# Altium PCB RPi_TSOP.PcbDoc
Units mil, origin at the board's own origin, x right, y up, seen from the top; angles counter-clockwise.
Board outline 500 x 600 mil, 2 copper layers (Top Layer, Bottom Layer); 4 components, 7 nets, 18 pads, 0 vias.
Unrouted connection lines stored in the file: 6.
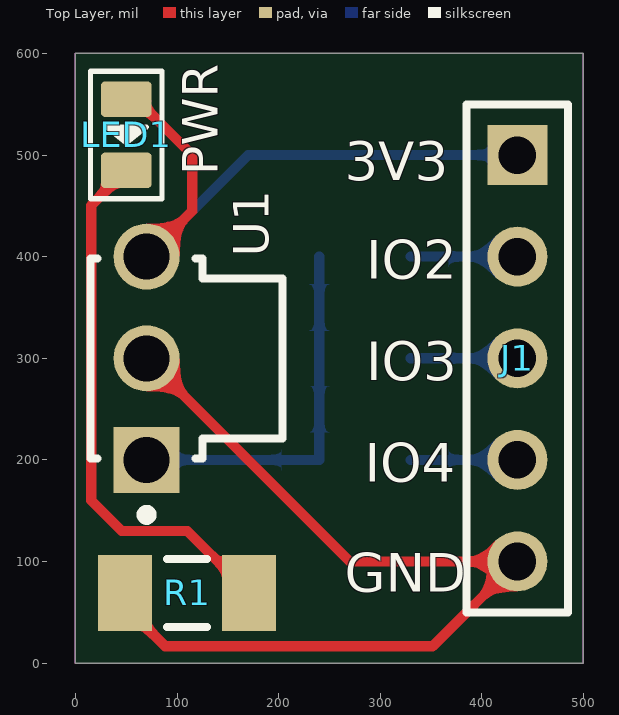
[diagram p0: Top Layer view]
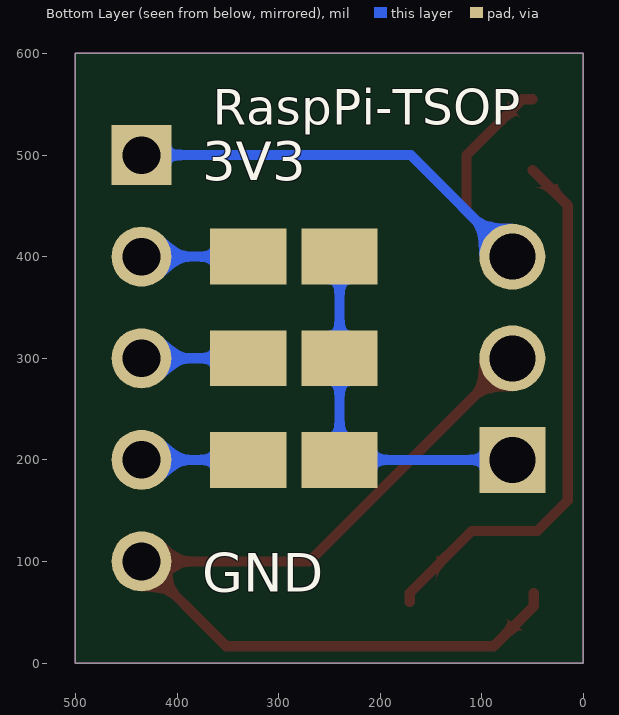
[diagram p1: Bottom Layer view, seen from below]

## Layer stack, top to bottom
Top Solder: solder mask 0.4, Solder Resist, Dk 3.5
Top Layer: signal copper 1.4
Dielectric 1: dielectric 12.6, FR-4, Dk 4.8
Bottom Layer: signal copper 1.4
Bottom Solder: solder mask 0.4, Solder Resist, Dk 3.5

## Board outline
0,0 500,0 500,600 0,600

## Design rules (kind name [scope] priority, off if disabled: settings)
Clearance [All] p1: gap=6 ignorepadtopadclearanceinfootprint=FALSE
ComponentClearance [All] p1 off: gap=10 collisioncheckmode=3 verticalgap=10 showdistances=FALSE
Height [All] p1 off: minheight=0 maxheight=1000 prefheight=500
MinimumSolderMaskSliver [All] p1: minsoldermaskwidth=5
PolygonConnect [All] p1: connectstyle=Relief reliefconductorwidth=10 reliefentries=4 polygonreliefangle="90 Angle" airgapwidth=10
RoutingVias [All] p1: holewidth=28 width=50 viastyle="Through Hole" minholewidth=28 minwidth=50 maxholewidth=28 maxwidth=50
SilkToSolderMaskClearance [IsPad] p1: minsilkscreentomaskgap=7 clearancetoexposedcopper=TRUE
SolderMaskExpansion [All] p1: expansion=4
Width [All] p1: maxlimit=100 minlimit=10 preferedwidth=10
26 further rules are at their usual default settings.

## Components (designator, comment, footprint, x,y, rotation, side; value= is the part's Value field where it differs from the comment)
J1 "RaspberryPI Conn" HDR1X5 435,500 r270 top
LED1 "PWR" LED-0805 50,520 r270 top value=LED-0805
R1 "Resistor" RESC1206(3216)_M 110,68.98 r180 top value=1k
U1 "TSOP38238" VISH-TSOP38238 70,300 r90 top

## Footprints (in the part's own frame and the unit in brackets; to place one, negate y for a bottom-side part, rotate by r counter-clockwise, add the part's x,y. Pads: shape width x height; smd on the part's side, far side on the other; paste and mask are expansions set on the pad)
HDR1X5 [mm] "Connector; Header; 5 Position"
  rect 1.5x1.5 hole 0.94: 1(0,0)
  round 1.5 hole 0.94: 2(2.54,0) 3(5.08,0) 4(7.62,0) 5(10.16,0)
  silkscreen extent -1.27,-1.27 11.43,1.27
LED-0805 [mil]
  rrect25% 35x50 smd: +(-35,0) -(35,0)
  silkscreen extent -63,-35 63,35
RESC1206(3216)_M [mm]
  rect 1.35x1.9 smd: 1(-1.55,0) 2(1.55,0)
  silkscreen extent -0.5,-0.85 0.5,0.85, body extent -1.67,-0.87 1.67,0.87, height 0.75
VISH-TSOP38238 [mm] "TH, 3-Leads, Body 5.00x4.80mm, Pitch 2.54mm"
  rect 1.65x1.65 hole 1.15: 1(-2.54,0)
  round 1.65 hole 1.15: 2(0,0) 3(2.54,0)
  silkscreen extent -4.04,-3.4 2.5,1.4, body extent -2.89,-3.4 2.89,1.4, height 8.55

## Part data
J1: library part "Header 5", "Header, 5-Pin", LatestRevisionDate=17-Jul-2002, LatestRevisionNote="Re-released for DXP Platform.", Publisher="Altium Limited"
LED1: library part SMD-LED-CLEAR-RED(0805), "5V Power Indicator", MPN=17-215SURC/S530-A2/TR8, PackageDescription=0805, PackageReference=0805
R1: library part CMP-2003-01077-1, "RESISTOR, SMD, 1206", Tolerance=5%, PackageDescription=1206, PackageReference=1206
U1: library part CMP-1666-00022-1, "IR Receiver Modules for Remote Control System, 2.5 to 5.5 V, -25 to 85 degC, 3-Pin THD, RoHS, Bulk", Capacitance="1.8E-11 f", Frequency="24 MHz", Frequency Tolerance=30ppm, Load Capacitance="18 pF", Max Operating Temperature=70degC, Min Operating Temperature=-20degC, Package Quantity=1000, Resistance="40 Ohm", ComponentLink1Description="Manufacturer URL", ComponentLink1URL=http://www.vishay.com/, ComponentLink2Description=Datasheet, ComponentLink2URL=http://www.vishay.com/docs/82491/tsop382.pdf, DatasheetVersion="Rev. 1.5, 07/2016", ESR="40 Ohm", Height="0.041 inch", Length="0.197 inch", Mount="Surface Mount", PackageDescription="3-Pin Through Hole Device, Body 5.00 x 4.80 mm, Pitch 2.54 mm", PackageReference=VISH-TSOP38238, Packaging="Tape and Reel", Pins=4, REACH SVHC="No SVHC", RoHSCompliant=True, Tolerance=30ppm, Width="0.126 inch"

## Free pads (board coordinates)
  rect 75x55 smd far side: 2(330,400) 3(330,300) 4(330,200) 5(240,200) 5(240,300) 5(240,400)

## Nets (pads, with @x,y where several pads share a name; then routed paths per layer and width w, separated by ;. In a path a pad name is that pad's centre, name@x,y a point inside that pad or via, vN(x,y) a via of type N, cw(c..) or ccw(c..) an arc to the next point about the centre after c; other vN are vias at no path point)
3V3: J1.1 LED1.+ U1.3 | length 612.8
  Top Layer w10: LED1.+ 60,555 115,500 115,445 U1.3
  Bottom Layer w10: U1.3 170,500 J1.1
GND: J1.5 R1.2 U1.2 | length 897.7
  Top Layer w10: R1.2 48.98,56.02 88.43,16.57 351.57,16.57 J1.5 270,100 U1.2
GPIO2: J1.2 pad.2 | length 105
  Bottom Layer w10: pad.2 J1.2
GPIO3: J1.3 pad.3 | length 105
  Bottom Layer w10: pad.3 J1.3
GPIO4: J1.4 pad.4 | length 105
  Bottom Layer w10: pad.4 J1.4
Net_U1: pad.5 U1.1 | length 370
  Bottom Layer w10: U1.1 240,200 240,300 pad.5@240,400
NetLED1_-: LED1.- R1.1 | length 541.5
  Top Layer w10: LED1.- 15.5,450.5 15.5,160 45.5,130 110,130 R1.1 R1.1@171.02,60

## Keep-outs
Keep-Out Layer:
  the board outline again, w1

## Silkscreen, mask and mechanical layers (free items; w line width, h text height)
Top Overlay:
  text "3V3" at 265,475 h38
  text "IO2" at 286.16,378.43 h38
  text "IO3" at 286.16,278.43 h38
  text "IO4" at 284.49,178.43 h38
  text "GND" at 265,70 h38
Bottom Overlay:
  text "RaspPi-TSOP" at 365,530 h35
  text "3V3" at 375,475 h38
  text "GND" at 375,70 h38